# Altium PCB Ad Hoc Radio Node 2005 v4.PCBDOC
Units mm, origin at the board's own origin, x right, y up, seen from the top; angles counter-clockwise.
Board outline 127 x 101.6 mm, 4 copper layers (Top Layer, Internal Plane 1, Internal Plane 2, Bottom Layer); 63 components, 72 nets, 263 pads, 22 vias.
Unrouted connection lines stored in the file: 1.
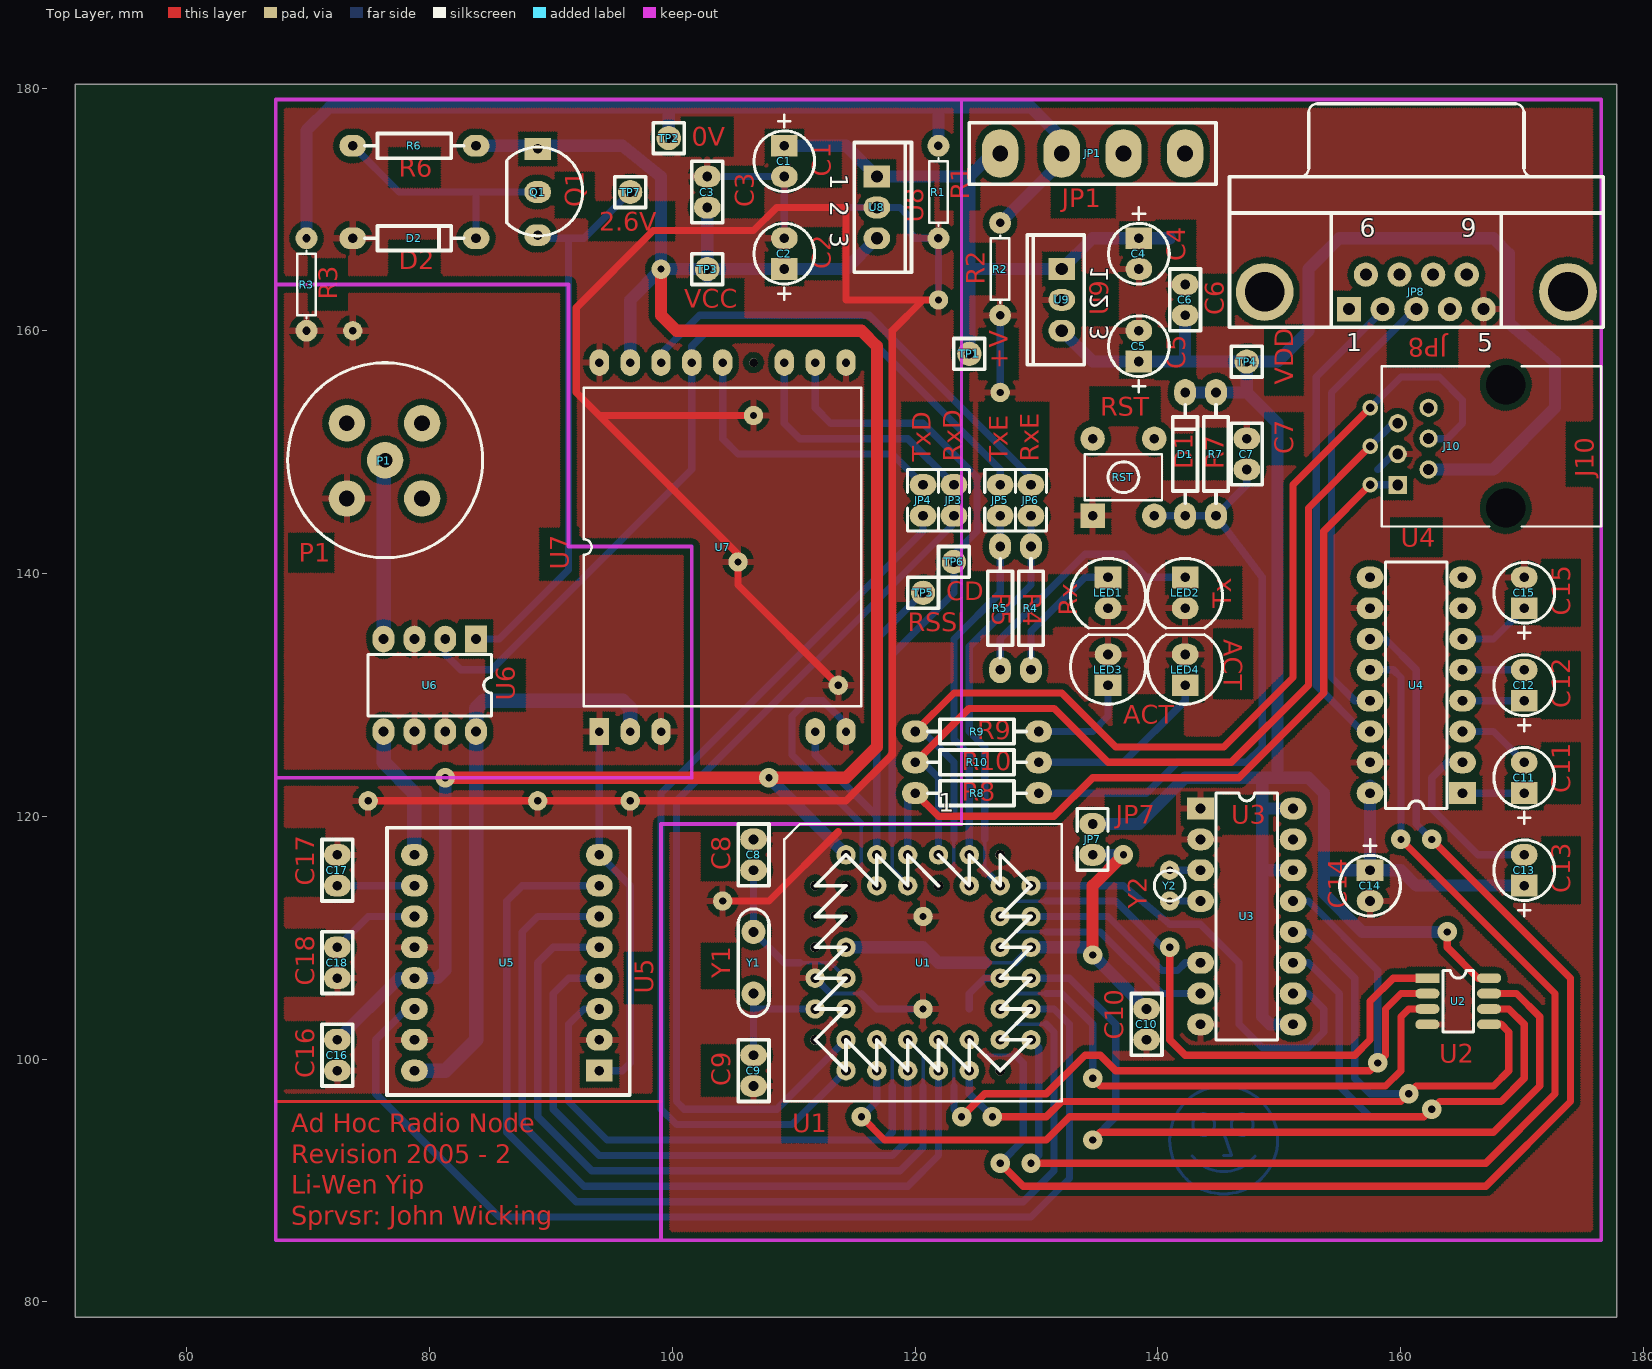
[diagram p0: Top Layer view]
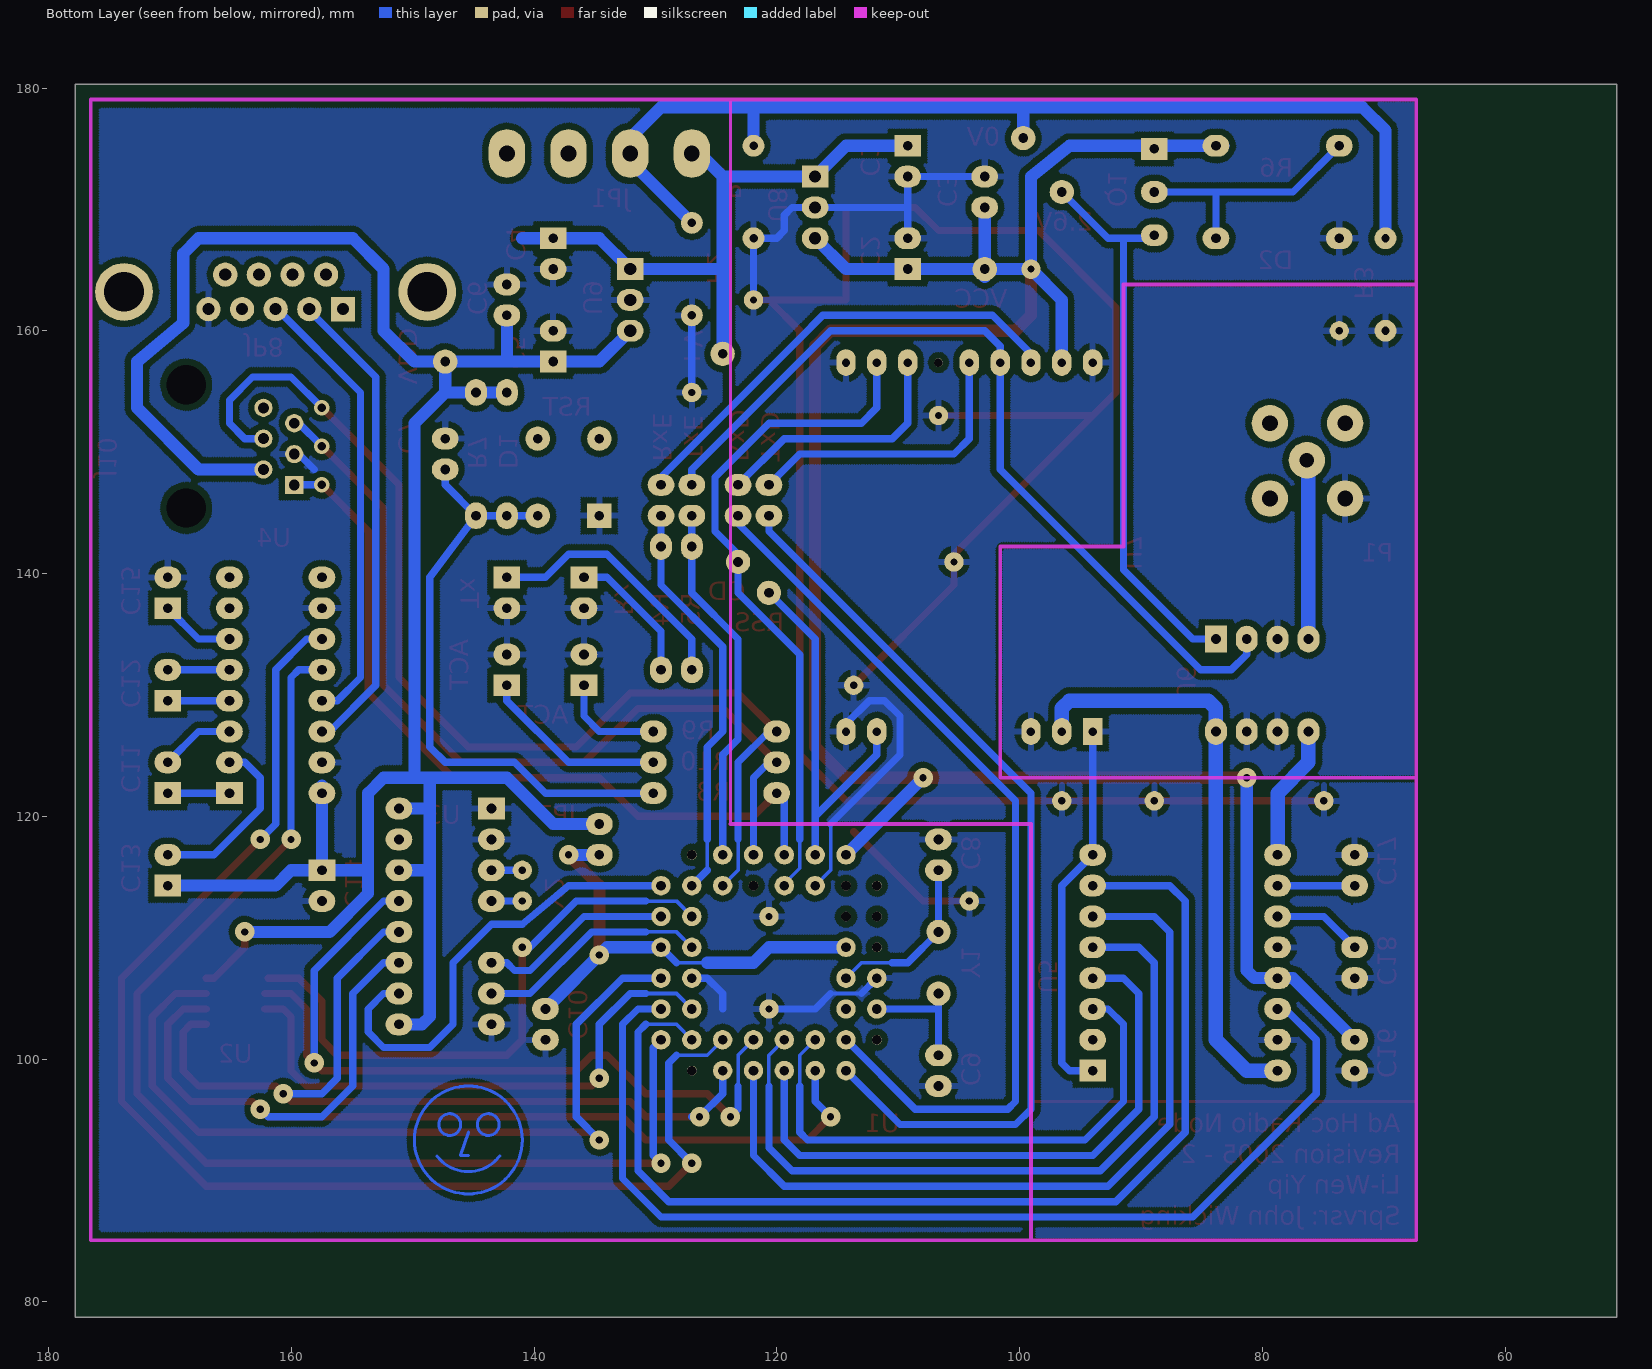
[diagram p1: Bottom Layer view, seen from below]
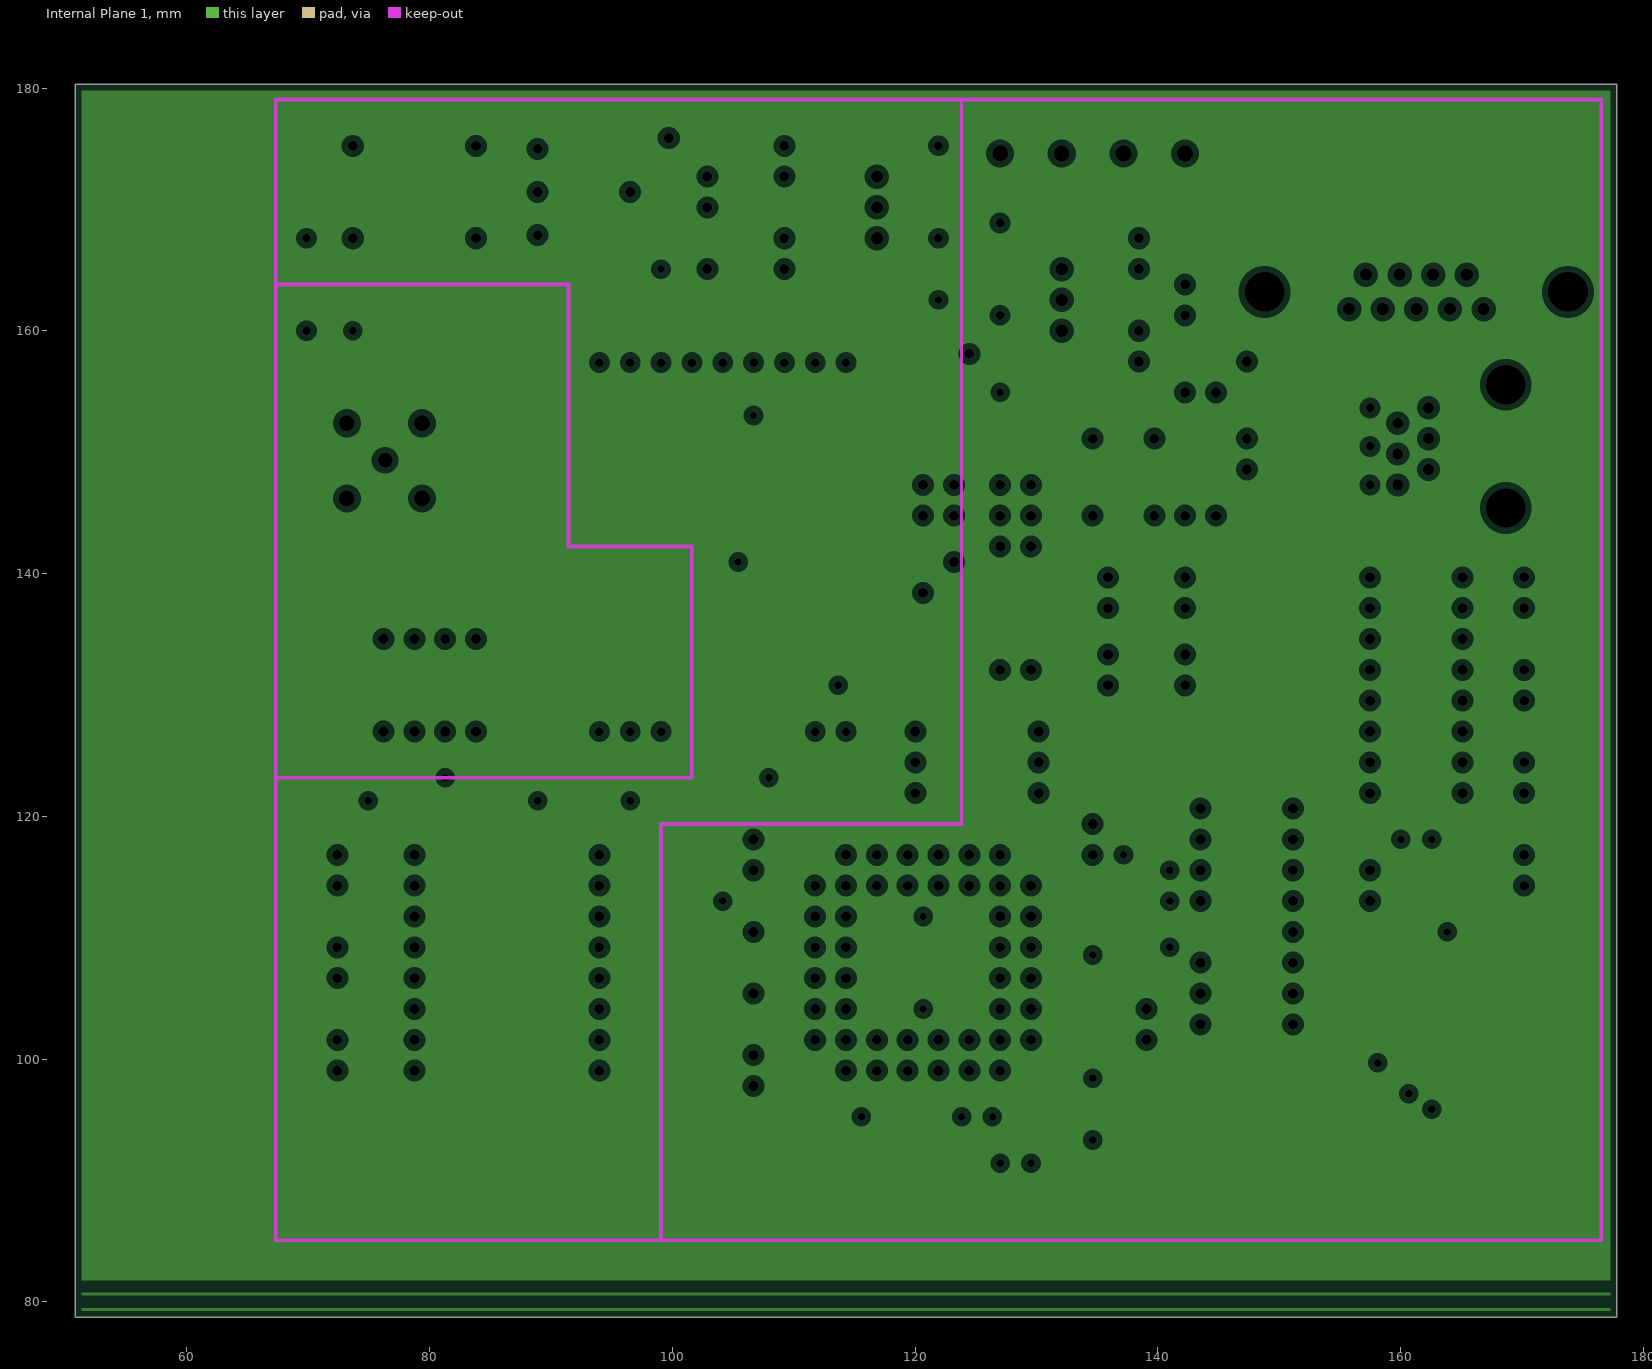
[diagram p2: Internal Plane 1, clearances drawn from the general rule]
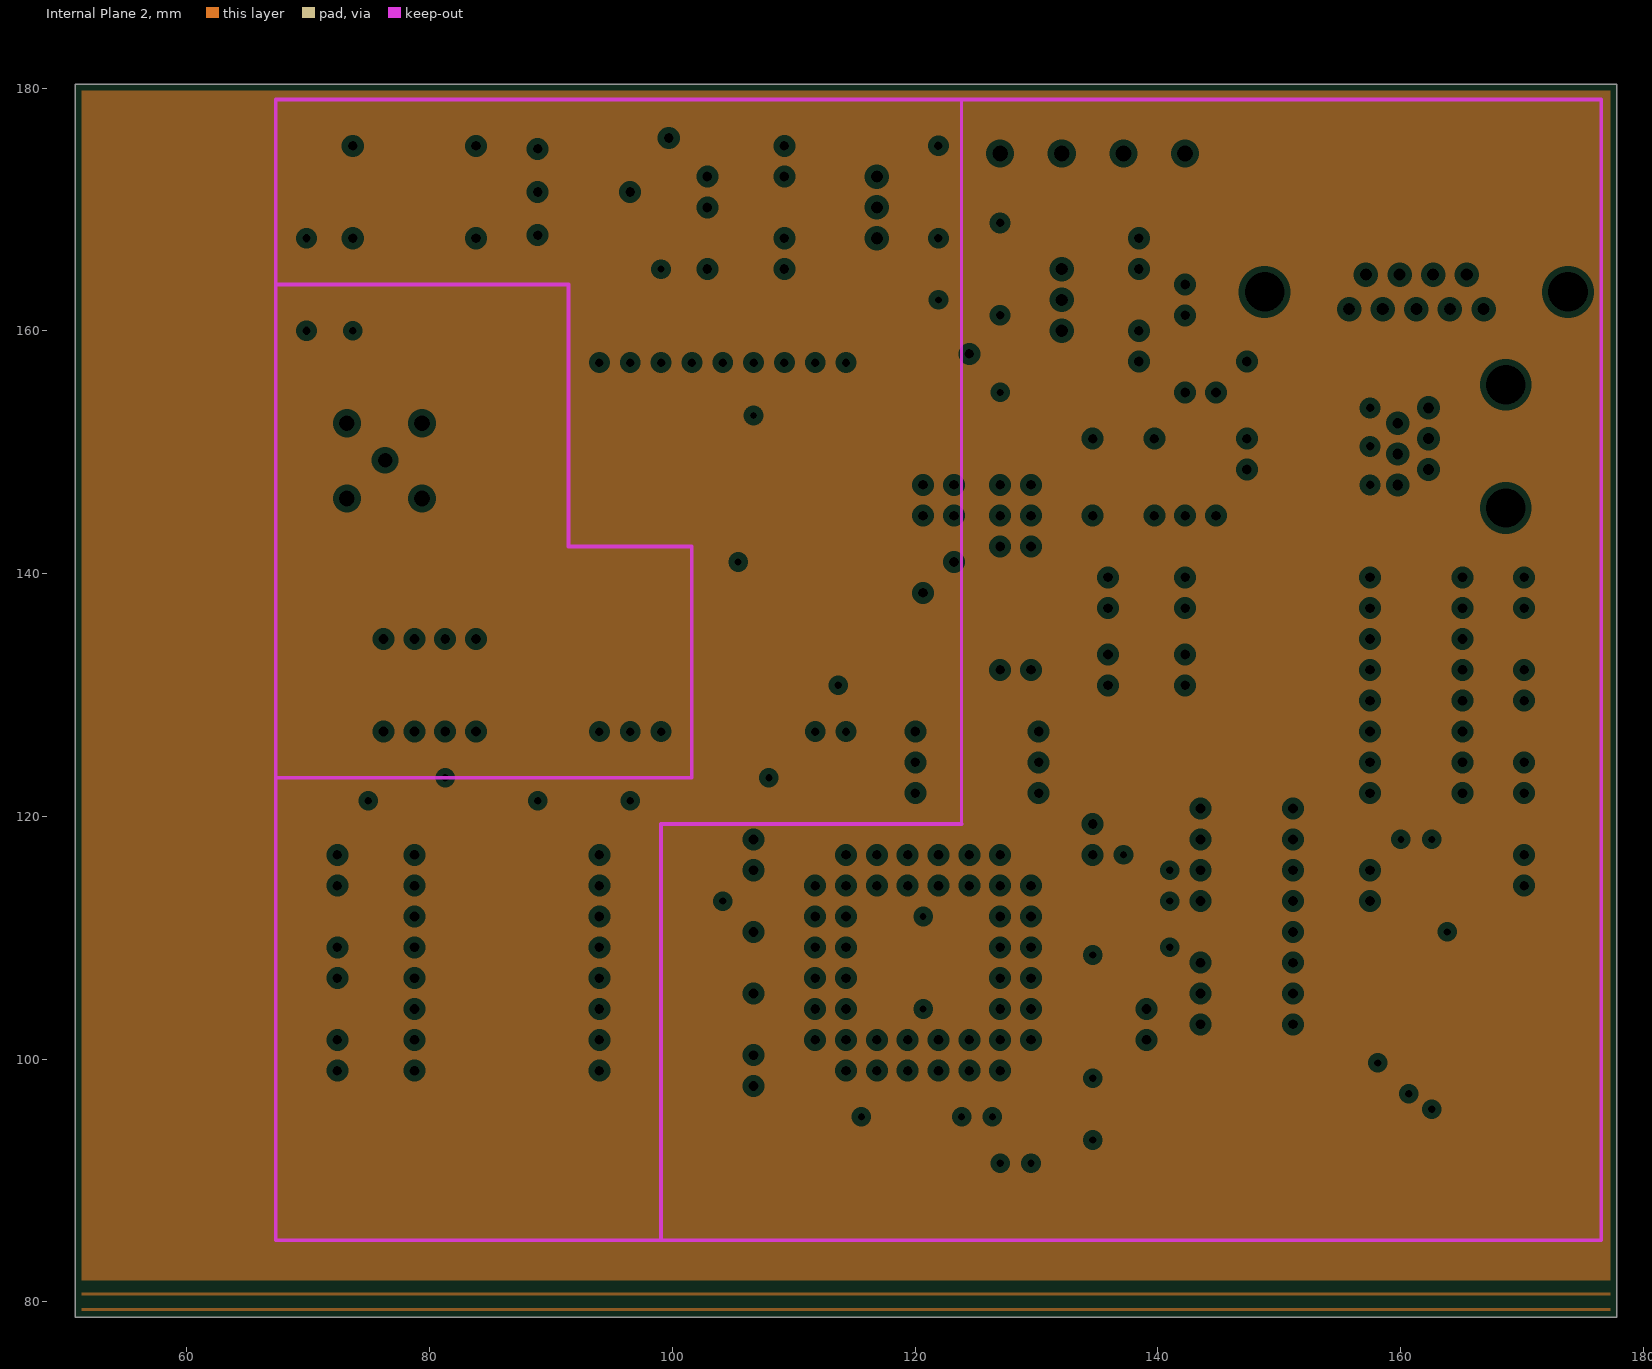
[diagram p3: Internal Plane 2, clearances drawn from the general rule]

## Layer stack, top to bottom
Top Layer: signal copper 0.0356
Dielectric: dielectric 0.32, FR-4, Dk 4.8
Internal Plane 1: plane copper 0.0356
Dielectric: dielectric 0.32, FR-4, Dk 4.8
Internal Plane 2: plane copper 0.0356
Dielectric: dielectric 0.32, FR-4, Dk 4.8
Bottom Layer: signal copper 0.0356

## Board outline
50.8,78.74 177.8,78.74 177.8,180.34 50.8,180.34

## Design rules (kind name [scope] priority, off if disabled: settings)
Clearance [All vs OnLayer('Keep-Out Layer')] p1: gap=0.5
Clearance Clearance_1 [All] p2: gap=0.5
ComponentClearance [All] p1: gap=0.254 collisioncheckmode=0
HoleSize [All] p1: absolutevalues=TRUE maxlimit=5 minlimit=0.6 maxpercent=80.000 minpercent=20.000
PlaneClearance [All] p1: clearance=0.508
PlaneConnect [All] p1: planeconnectstyle=Relief reliefexpansion=0.508 reliefentries=4 reliefconductorwidth=0.254 reliefairgap=0.254
PolygonConnect [All] p1: connectstyle=Relief reliefconductorwidth=0.5 reliefentries=4 polygonreliefangle="90 Angle"
RoomDefinition "Ad Hoc Radio Node 2005 v4" [InComponentClass('Ad Hoc Radio Node 2005 v4')] p1: confinementstyle=ConfineIn formatcopy=TRUE outline 0,0 50.8,0 50.8,25.4 0,25.4
RoutingLayers [All] p1: top layer=Horizontal bottom layer=Vertical
RoutingVias [All] p1: holewidth=0.6 width=1.6 viastyle="Through Hole" minholewidth=0.6 minwidth=1.6 maxholewidth=0.6 maxwidth=1.6
SolderMaskExpansion [All] p1: expansion=0.102
TestPointUsage [All] p1: valid=0 allowmultiple=FALSE
Testpoint [All] p1: side=15 testpointundercomponent=TRUE minsize=1.016 maxsize=2.54 preferedsize=1.524 minholesize=0 maxholesize=1.016 preferedholesize=0.813 testpointgrid=0.025 style=1023 order=-539222988
Width [All] p1: maxlimit=1.27 minlimit=0.3 preferedwidth=0.305 toplayer_prefwidth=0.6 bottomlayer_prefwidth=1 minimp=50.000000 maximp=50.000000 favimp=50.000000
13 further rules are at their usual default settings.

## Components (designator, comment, footprint, x,y, rotation, side; value= is the part's Value field where it differs from the comment)
C1 "Cap" "0.1 ELECTRO CAP" 109.22,175.26 r270 top
C2 "Cap" "0.1 ELECTRO CAP" 109.22,165.1 r90 top
C3 "Cap" "0.1 CERAMIC CAP" 105.41,172.72 r90 top
C4 "Cap" "0.1 ELECTRO CAP" 138.43,167.64 r270 top
C5 "Cap" "0.1 ELECTRO CAP" 138.43,157.48 r90 top
C6 "Cap" "0.1 CERAMIC CAP" 144.78,163.83 r90 top
C7 "0.1uF" "0.1 ceramic cap" 149.86,151.13 r90 top
C8 "Cap" "0.1 CERAMIC CAP" 104.14,115.57 r270 top
C9 "Cap" "0.1 CERAMIC CAP" 109.22,100.33 r90 top
C10 "" "0.1 CERAMIC CAP" 136.525,101.6 r270 top
C11 "Cap2" "0.1 ELECTRO CAP" 170.18,121.92 r90 top
C12 "Cap2" "0.1 ELECTRO CAP" 170.18,129.54 r90 top
C13 "Cap2" "0.1 ELECTRO CAP" 170.18,114.3 r90 top
C14 "Cap2" "0.1 ELECTRO CAP" 157.48,115.57 r270 top
C15 "Cap2" "0.1 ELECTRO CAP" 170.18,137.16 r90 top
C16 "" "0.1 CERAMIC CAP" 74.93,101.6 r90 top
C17 "" "0.1 CERAMIC CAP" 74.93,116.84 r90 top
C18 "" "0.1 CERAMIC CAP" 69.85,106.68 r270 top
D1 "1N914" DIODE-0.4/1.8 142.24,147.32 r90 top (schematic designator D2)
D2 "D Zener" DIODE-0.4/1.8 76.2,167.64 r0 top
J10 "43202-6101" JACK1.27-2H6 176.53,150.495 r90 top
JP1 "Header 4" "4 WAY TERMINAL BLOCK" 127,174.625 r0 top
JP3 "RxD" JUMPER 123.19,144.78 r90 top (schematic designator JP5)
JP4 "TxD" JUMPER 120.65,144.78 r90 top (schematic designator JP6)
JP5 "TxE" JUMPER 127,147.32 r270 top (schematic designator JP3)
JP6 "RxE" JUMPER 129.54,144.78 r90 top (schematic designator JP4)
JP7 "PWR" JUMPER 134.62,116.84 r90 top
JP8 "D Connector 9" DSUB1.385-2H9 161.29,172.72 r0 top (schematic designator JP7)
LED1 "Rx" "STD LED" 135.89,139.7 r270 top
LED2 "Tx" "STD LED" 142.24,139.7 r270 top
LED3 "ACT" "STD LED" 135.89,130.81 r90 top
LED4 "ACT" "STD LED" 142.24,130.81 r90 top
P1 "PCB BNC CONNECTOR" "PCB BNC CONNECTOR" 79.375,152.4 r270 top (schematic designator P2)
Q1 "BC548" BJT 88.9,173.99 r270 top
R1 "" AXIAL-0.3 121.92,171.45 r270 top
R2 "" AXIAL-0.3 127,165.1 r270 top
R3 "" AXIAL-0.3 69.85,163.83 r270 top
R4 "" AXIAL-0.4/1.8 129.54,139.7 r270 top
R5 "" AXIAL-0.4/1.8 127,139.7 r270 top
R6 "" AXIAL-0.4/1.8 81.28,175.26 r180 top
R7 "Res1" AXIAL-0.4/1.8 144.78,147.32 r90 top
R8 "Res1" AXIAL-0.4/1.8 122.555,121.92 r0 top
R9 "" AXIAL-0.4/1.8 122.555,127 r0 top
R10 "" AXIAL-0.4/1.8 122.555,124.46 r0 top
RST "SW-PB" "RESET SWITCH" 134.62,144.145 r90 top (schematic designator S1)
TP1 "+V" TESTPOINT 121.92,158.115 r0 top
TP2 "0V" TESTPOINT 97.155,175.895 r0 top
TP3 "VCC" TESTPOINT 102.87,167.64 r270 top
TP4 "VDD" TESTPOINT 147.32,160.02 r270 top
TP5 "RSSI" TESTPOINT 118.11,138.43 r0 top
TP6 "CD" TESTPOINT 120.65,140.97 r0 top
TP7 "2.6V" TESTPOINT 93.98,171.45 r0 top
U1 "PIC18C452_PLCC" "PLCC 44-WAY IC SOCKET" 111.76,116.84 r0 top
U2 "FRAM" SOP-8 162.205,106.68 r0 top
U3 "DS1306" DIP-16#1 143.51,120.65 r0 top
U4 "MAX232EPE" DIP-16#2 165.1,121.92 r180 top
U5 "" "ad8639 carrier board" 93.98,99.06 r180 top
U6 "ADG918" DIP-8 83.82,134.62 r270 top
U7 "X2010 NBFM Transceiver" X2010 93.98,127 r90 top
U8 "LM340T5.0" SFM-T3/A4.7V 116.84,170.18 r270 top
U9 "LM340T5.0" SFM-T3/A4.7V 132.08,162.56 r270 top
Y1 "XTAL" XTAL 106.68,110.49 r270 top
Y2 "XTAL" "watch crystal" 143.51,114.3 r270 top

## Footprints (in the part's own frame and the unit in brackets; to place one, negate y for a bottom-side part, rotate by r counter-clockwise, add the part's x,y. Pads: shape width x height; smd on the part's side, far side on the other; paste and mask are expansions set on the pad)
"0.1 CERAMIC CAP" [mm]
  oval 1.8x2.2 hole 0.8: 1(-2.54,2.54) 2(0,2.54)
  silkscreen extent -3.81,1.27 1.27,3.81
"0.1 ceramic cap" [mm]
  oval 1.8x2.2 hole 0.8: 1(-2.54,2.54) 2(0,2.54)
  silkscreen extent -3.81,1.27 1.27,3.81
"0.1 ELECTRO CAP" [mm] "Electrolytic Cap"
  rect 1.8x2.2 hole 0.8: 1(0,0)
  oval 1.8x2.2 hole 0.8: 2(2.54,0)
  silkscreen extent -2.54,-2.5 3.77,2.5
"4 WAY TERMINAL BLOCK" [mm]
  oval 3x4 hole 1.3: 1(0,0) 2(5.08,0) 3(10.16,0) 4(15.24,0)
  silkscreen extent -2.54,-2.54 17.78,2.54
"ad8639 carrier board" [mm]
  rect 2.2x1.8 hole 0.8: 1(0,0)
  oval 2.2x1.8 hole 0.8: 2(0,-2.54) 3(0,-5.08) 4(0,-7.62) 5(0,-10.16) 6(0,-12.7) 7(0,-15.24) 8(0,-17.78) 9(15.24,-17.78) 10(15.24,-15.24) 11(15.24,-12.7) 12(15.24,-10.16) 13(15.24,-7.62) 14(15.24,-5.08) 15(15.24,-2.54) 16(15.24,0)
  silkscreen extent -2.5,-20 17.5,2
AXIAL-0.3 [mm]
  round 1.8 hole 0.7: 1(-3.81,0) 2(3.81,0)
  silkscreen extent -2.77,-0.76 2.77,0.76
AXIAL-0.4/1.8 [mm]
  oval 2.2x1.8 hole 0.8: 1(-2.54,0) 2(7.62,0)
  silkscreen extent -1.52,-1.02 6.6,1.02
BJT [mm]
  rect 1.8x2.2 hole 0.8: 1(-1.016,0)
  oval 1.8x2.2 hole 0.8: 2(2.54,0) 3(6.096,0)
  silkscreen extent -1.16,-2.54 6.15,3.71
DIODE-0.4/1.8 [mm]
  oval 2.2x1.8 hole 0.8: 1(-2.54,0) 2(7.62,0)
  silkscreen extent -1.52,-1.02 6.6,1.02
DIP-8 [mm]
  rect 2.2x1.8 hole 0.8: 1(0,0)
  oval 2.2x1.8 hole 0.8: 2(0,-2.54) 3(0,-5.08) 4(0,-7.62) 5(7.62,-7.62) 6(7.62,-5.08) 7(7.62,-2.54) 8(7.62,0)
  silkscreen extent 1.27,-8.89 6.35,1.27
DIP-16#1 [mm]
  rect 2.2x1.8 hole 0.8: 1(0,0)
  oval 2.2x1.8 hole 0.8: 2(0,-2.54) 3(0,-5.08) 4(0,-7.62) 6(0,-12.7) 7(0,-15.24) 8(0,-17.78) 9(7.62,-17.78) 10(7.62,-15.24) 11(7.62,-12.7) 12(7.62,-10.16) 13(7.62,-7.62) 14(7.62,-5.08) 15(7.62,-2.54) 16(7.62,0)
  silkscreen extent 1.27,-19.05 6.35,1.27
DIP-16#2 [mm]
  rect 2.2x1.8 hole 0.8: 1(0,0)
  oval 2.2x1.8 hole 0.8: 2(0,-2.54) 3(0,-5.08) 4(0,-7.62) 5(0,-10.16) 6(0,-12.7) 7(0,-15.24) 8(0,-17.78) 9(7.62,-17.78) 10(7.62,-15.24) 11(7.62,-12.7) 12(7.62,-10.16) 13(7.62,-7.62) 14(7.62,-5.08) 15(7.62,-2.54) 16(7.62,0)
  silkscreen extent 1.27,-19.05 6.35,1.27
DSUB1.385-2H9 [mm]
  rect 2x2 hole 1: 1(-5.54,-10.92)
  round 2 hole 1: 2(-2.77,-10.92) 3(0,-10.92) 4(2.77,-10.92) 5(5.54,-10.92) 6(-4.155,-8.08) 7(-1.385,-8.08) 8(1.385,-8.08) 9(4.155,-8.08)
  round 4.76 hole 3.26: 10(-12.495,-9.5) 11(12.495,-9.5)
  silkscreen extent -15.4,-12.4 15.4,6
JACK1.27-2H6 [mm]
  rect 1.5x1.5 hole 0.9: 1(-3.175,16.77)
  round 1.5 hole 0.9: 2(-1.905,14.23) 3(-0.635,16.77) 4(0.635,14.23) 5(1.905,16.77) 6(3.175,14.23)
  round 2.95 hole 3.25: MH1(-5.08,7.88) MH2(5.08,7.88)
  silkscreen extent -6.6,0 6.6,18.1
JUMPER [mm]
  oval 1.8x2.2 hole 0.8: 1(0,0) 2(2.54,0)
  silkscreen extent -1.27,-1.27 3.81,1.27
"PCB BNC CONNECTOR" [mm]
  round 3 hole 1.2: 1(3.048,-3.048)
  round 3 hole 1.3: 2(0,0) 2(0,-6.2) 2(6.2,0) 2(6.2,-6.2)
  silkscreen extent -4.98,-11.08 11.08,4.98
"PLCC 44-WAY IC SOCKET" [mm]
  round 0.8 hole 0.8: 1(10.16,-2.54) 7(0,-2.54) 8(2.54,-2.54) 9(0,-5.08) 10(2.54,-5.08) 11(0,-7.62) 17(0,-15.24) 28(15.24,-17.78) 40(15.24,0)
  round 1.6 hole 0.8: 2(7.62,0) 3(7.62,-2.54) 4(5.08,0) 5(5.08,-2.54) 6(2.54,0) 12(2.54,-7.62) 13(0,-10.16) 14(2.54,-10.16) 15(0,-12.7) 16(2.54,-12.7) 18(2.54,-17.78) 19(2.54,-15.24) 20(5.08,-17.78) 21(5.08,-15.24) 22(7.62,-17.78) 23(7.62,-15.24) 24(10.16,-17.78) 25(10.16,-15.24) 26(12.7,-17.78) 27(12.7,-15.24) 29(17.78,-15.24) 30(15.24,-15.24) 31(17.78,-12.7) 32(15.24,-12.7) 33(17.78,-10.16) 34(15.24,-10.16) 35(17.78,-7.62) 36(15.24,-7.62) 37(17.78,-5.08) 38(15.24,-5.08) 39(17.78,-2.54) 41(15.24,-2.54) 42(12.7,0) 43(12.7,-2.54) 44(10.16,0)
  silkscreen extent -2.54,-20.32 20.32,2.54
"RESET SWITCH" [mm]
  rect 2x2 hole 0.8: 1(0.635,0)
  round 2 hole 0.8: 2(0.635,-5.08) ""(6.985,-5.08) ""(6.985,0)
  silkscreen extent 1.91,-5.71 5.71,0.64
SFM-T3/A4.7V [mm]
  rect 1.8x2.2 hole 1: 1(-2.54,0)
  oval 1.8x2.2 hole 1: 2(0,0) 3(2.54,0)
  silkscreen extent -5.35,-1.85 5.35,2.85
SOP-8 [mm]
  rect 2x0.8 smd: 1(0,0)
  oval 2x0.8 smd: 2(0,-1.27) 3(0,-2.54) 4(0,-3.81) 5(5.08,-3.81) 6(5.08,-2.54) 7(5.08,-1.27) 8(5.08,0)
  silkscreen extent 1.27,-4.44 3.81,0.64
"STD LED" [mm]
  rect 1.8x2.2 hole 0.8: 1(0,0)
  oval 1.8x2.2 hole 0.8: 2(2.54,0)
  silkscreen extent -1.56,-3.09 4.17,3.09
TESTPOINT [mm] "Test Point"
  round 2 hole 0.8: 1(2.54,0)
  silkscreen extent 1.27,-1.27 3.81,1.27
"watch crystal" [mm]
  round 1.6 hole 0.6: 1(-1.27,-2.54) 2(1.27,-2.54)
  silkscreen extent -1.27,-3.81 1.27,-1.27
X2010 [mm]
  rect 2.2x1.6 hole 0.7: 1(0,0)
  oval 2.2x1.6 hole 0.7: 2(0,-2.54) 3(0,-5.08) 8(0,-17.78) 9(0,-20.32) 10(30.4,-20.32) 11(30.4,-17.78) 12(30.4,-15.24) 14(30.4,-10.16) 15(30.4,-7.62) 16(30.4,-5.08) 17(30.4,-2.54) 18(30.4,0)
  round 0.7 hole 0.7: 13(30.4,-12.7)
  silkscreen extent 2.08,-21.59 28.32,1.27
XTAL [mm] "Crystal"
  round 2 hole 0.8: 1(0,0) 2(5.08,0)
  silkscreen extent -1.9,-1.27 6.98,1.27

## Part data
C1 C2 C3 C4 C5 C6 C8 C9 C11 C12 C13 C15: "Capacitor"
C7: library part CAP, "Capacitor"
C10 C16 C17 C18: library part Cap, "Capacitor"
C14: library part "Cap Pol1", "Polarized Capacitor (Radial)"
D1: library part Diode, "Default Diode"
D2: "Zener Diode"
J10: library part 15-43-6566, "Right Angle, Standard Profile, Flange Mount PCB Jack"
JP1: "Header, 4-Pin"
JP3 JP4 JP5 JP6 JP7: library part JUMPER
JP8: "Receptacle Assembly, 9 Position, Right Angle"
LED1 LED2 LED3 LED4: library part LED2, "Typical RED, GREEN, YELLOW, AMBER GaAs LED"
P1: library part BNC, "BNC Elbow Connector"
Q1: library part NPN, "NPN Bipolar Transistor"
R1 R2 R3 R4 R5 R6 R9 R10: library part Res1, "Resistor"
R7 R8: "Resistor"
RST: "Switch"
TP1 TP2 TP3 TP4 TP5 TP6 TP7: library part TESTPOINT, "Test Point"
U4: "+5V Powered RS-232 Driver/Receiver"
U5: library part AD8369_DIGITAL_CONT_PWR_AMP
U6: library part "T7 NBFM TRANSMITTER"
U7: library part "R7 NBFM RECEIVER"
U8 U9: "Series 3-Terminal Positive Regulator"
Y1 Y2: "Crystal Oscillator"

## Free pads (board coordinates)
  round 1.6 hole 0.6: 0(121.92,162.56) 1(127,154.94) 2(74.93,121.285) 2(120.65,104.14) 3(73.66,160.02) 3(120.65,111.76) 4(105.41,140.97) 6(104.14,113.03) 7(106.68,153.035) 8(113.665,130.81) 9(88.9,121.285) 10(96.52,121.285)

## Via types
v1: diameter 1.6, hole 0.6, Top Layer to Bottom Layer, 19 vias
v2: diameter 1.27, hole 0.711, Top Layer to Bottom Layer, 3 vias

## Nets (pads, with @x,y where several pads share a name; then routed paths per layer and width w, separated by ;. In a path a pad name is that pad's centre, name@x,y a point inside that pad or via, vN(x,y) a via of type N, cw(c..) or ccw(c..) an arc to the next point about the centre after c; other vN are vias at no path point)
0V: JP1.2 R1.1 R2.1 R3.1 TP2.1 | length 87.8
  Bottom Layer w1: R3.1 69.85,176.53 71.755,178.435 129.54,178.435 132.08,175.895 132.08,173.99 R2.1 ; TP2.1 99.695,178.435 ; R1.1 121.92,178.435
2.6V: Q1.3 TP7.1 U6.1 | length 46.5
  Bottom Layer w0.6: U6.1 85.725,134.62 91.44,140.335 91.44,167.64 ; Q1.3@88.9,167.64 91.44,167.64 ; TP7.1 92.71,167.64 91.44,167.64
3.3V: D2.2 Q1.2 R6.2 | length 20.6
  Bottom Layer w0.6: R6.2 77.47,171.45 Q1.2 ; D2.2 83.82,171.45
ANTENNA: P1.1 U6.4 | length 14.6
  Bottom Layer w1.2: U6.4 P1.1@76.2,149.225
B0: U1.21 U5.3 | length 45.8
  Bottom Layer w0.3: U1.21 118.11,100.33 118.11,97.79
  Bottom Layer w0.6: U5.3 92.71,104.14 91.44,102.87 91.44,96.52 94.615,93.345 117.475,93.345 118.11,93.98 118.11,97.79
B1: U1.22 U5.4 | length 50.9
  Bottom Layer w0.6: U5.4 91.44,106.68 90.17,105.41 90.17,95.885 93.98,92.075 118.11,92.075 119.38,93.345 U1.22
B2: U1.23 U5.5 | length 62.1
  Bottom Layer w0.3: U1.23 120.65,100.33 120.65,97.79
  Bottom Layer w0.6: U5.5 90.17,109.22 88.9,107.95 88.9,95.25 93.345,90.805 118.745,90.805 120.65,92.71 120.65,97.79
B3: U1.24 U5.6 | length 67.2
  Bottom Layer w0.6: U5.6 88.9,111.76 87.63,110.49 87.63,94.615 92.71,89.535 119.38,89.535 121.92,92.075 U1.24
C1+: C11.1 U4.1 | length 5.1
  Bottom Layer w0.6: U4.1 C11.1
C1-: C11.2 U4.3 | length 6.1
  Bottom Layer w0.6: U4.3 167.64,127 C11.2
C2+: C12.1 U4.4 | length 5.1
  Bottom Layer w0.6: U4.4 C12.1
C2-: C12.2 U4.5 | length 5.1
  Bottom Layer w0.6: U4.5 C12.2
CD: TP6.1 U1.3 U7.11 | length 56.3
  Bottom Layer w0.3: 118.11,118.11 118.11,115.735 U1.3@119.38,114.465
  Bottom Layer w0.6: U7.11 111.76,153.67 113.03,152.4 120.65,152.4 125.095,147.955 125.095,143.51 123.19,141.605 123.19,138.43 118.11,133.35 118.11,118.11
CPUPWR: C10.1 JP7.1 U1.12 U1.35 | length 39.8
  Top Layer w1: v1(134.62,108.585) 134.62,114.3 v1(137.16,116.84)
  Bottom Layer w0.3: 125.73,107.95 128.27,107.95
  Bottom Layer w0.6: 128.27,107.95 U1.35
  Bottom Layer w1: U1.12 120.65,109.22 121.92,107.95 125.73,107.95 ; U1.35 133.985,109.22 C10.1 ; JP7.1 v1(137.16,116.84)
DENB: U1.30 U5.7 | length 93
  Bottom Layer w0.3: U1.30 128.27,102.87 130.81,102.87
  Bottom Layer w0.6: U5.7@94.615,114.3 87.63,114.3 86.36,113.03 86.36,93.98 92.075,88.265 128.905,88.265 131.445,90.805 131.445,102.235 130.81,102.87
FRAM_CS: U1.38 U2.1 | length 49.7
  Top Layer w0.6: v1(140.97,109.22) 140.97,101.6 142.24,100.33 156.21,100.33 157.48,101.6 157.48,104.775 159.385,106.68 U2.1@161.925,106.68
  Bottom Layer w0.3: U1.38 128.27,113.03 130.81,113.03
  Bottom Layer w0.6: 130.81,113.03 132.715,113.03 136.525,113.03 140.335,109.22 v1(140.97,109.22)
GND: C4.2 C5.2 C6.2 C7.2 C8.1 C9.1 C10.2 C14.2 C15.2 J10.3 JP8.5 LED1.2 LED2.2 LED3.2 LED4.2 pad.1 pad.2@120.65,104.14 pad.3@120.65,111.76 pad.6 R2.2 RST.1 U1.13 U1.34 U2.4 U3.1 U3.2 U3.8 U4.10 U4.15 U9.2 | length 34.7
  Top Layer w0.6: pad.6 107.95,113.03 113.665,118.745
  Bottom Layer w0.3: 113.03,105.41 115.57,105.41
  Bottom Layer w0.6: U1.13 113.03,105.41 ; 115.57,105.41 116.84,104.14 pad.2@120.65,104.14 ; 124.46,104.14 124.46,105.41 125.73,106.68 U1.34 ; pad.1 R2.2 ; 158.115,148.59 159.385,149.86 J10.3
HOLD: U1.33 U2.7 | length 68.5
  Top Layer w0.6: v1(134.62,93.345) 135.255,93.98 167.64,93.98 171.45,97.79 171.45,103.505 169.545,105.41 U2.7@167.005,105.41
  Bottom Layer w0.6: U1.33 132.715,106.68 136.525,102.87 136.525,95.25 v1(134.62,93.345)
INT1: U1.37 U3.6 | length 16.1
  Bottom Layer w0.6: U1.37 135.89,111.76 140.335,107.315 141.605,107.315 142.24,107.95 U3.6
INTO: U1.36 U3.7 | length 19.1
  Bottom Layer w0.3: U1.36 128.27,110.49 130.81,110.49
  Bottom Layer w0.6: 130.81,110.49 135.255,110.49 140.335,105.41 U3.7
MCLR: J10.1 R8.1 U1.2 | length 64.6
  Top Layer w0.6: R8.1 121.92,120.015 131.445,120.015 134.62,123.19 146.685,123.19 153.67,130.175 153.67,143.51 v2(157.48,147.32)
  Bottom Layer w0.6: U1.2@119.38,117.475 119.38,121.285 R8.1 ; v2(157.48,147.32) J10.1@160.02,147.32
MISO: U1.25 U2.2 U3.13 | length 70
  Top Layer w0.6: v1(123.825,95.25) 125.73,97.155 130.81,97.155 133.985,100.33 135.255,100.33 136.525,99.06 157.48,99.06 158.75,100.33 158.75,104.14 160.02,105.41 U2.2
  Bottom Layer w0.3: U1.25 123.19,100.33 123.19,97.79
  Bottom Layer w0.6: 123.19,97.79 123.19,95.885 v1(123.825,95.25) ; U3.13 152.4,113.03 158.115,107.315 v1(158.115,99.695)
MOSI: U1.26 U2.5 U3.12 | length 74.6
  Top Layer w0.6: v1(126.365,95.25) 130.81,95.25 132.08,96.52 160.02,96.52 161.29,97.79 167.64,97.79 168.91,99.06 168.91,102.235 168.275,102.87 U2.5@167.005,102.87
  Bottom Layer w0.6: U1.26 124.46,97.155 v1(126.365,95.25) v1@127,95.25 ; U3.12 152.4,110.49 156.21,106.68 156.21,98.425 157.48,97.155 v1(160.655,97.155)
NetC13_2: C13.2 U4.2 | length 14.8
  Bottom Layer w0.6: U4.2 163.83,124.46 162.56,123.19 162.56,120.65 166.37,116.84 C13.2
NetC15_1: C15.1 U4.6 | length 6.1
  Bottom Layer w0.6: U4.6 167.64,134.62 C15.1
NetC17_1: C17.1 U5.10 | length 6.3
  Bottom Layer w0.6: C17.1 U5.10
NetC18_1: C18.1 U5.11 | length 7.4
  Bottom Layer w0.6: C18.1 74.93,111.76 U5.11
NetLED1_1: LED1.1 R4.2 | length 11.4
  Bottom Layer w0.6: R4.2 129.54,135.255 133.985,139.7 LED1.1
NetLED2_1: LED2.1 R5.2 | length 21.5
  Bottom Layer w0.6: R5.2 127,134.62 133.985,141.605 137.16,141.605 139.065,139.7 LED2.1
NetLED3_1: LED3.1 R9.2 | length 8.8
  Bottom Layer w0.6: R9.2 134.62,127 135.89,128.27 LED3.1
NetLED4_1: LED4.1 R10.2 | length 15.4
  Bottom Layer w0.6: R10.2 137.16,124.46 142.24,129.54 LED4.1
NetU1_16: U1.16
NetU3_3: U3.3 Y2.1 | length 2.5
  Bottom Layer w0.6: Y2.1 U3.3
NetU3_4: U3.4 Y2.2 | length 2.5
  Bottom Layer w0.6: Y2.2 U3.4
OSC1: C8.2 U1.14 Y1.1 | length 14.3
  Bottom Layer w0.3: 110.49,107.95 113.03,107.95 U1.14
  Bottom Layer w0.6: C8.2 Y1.1 109.22,107.95 110.49,107.95
OSC2: C9.2 U1.15 Y1.2 | length 10.2
  Bottom Layer w0.6: C9.2 Y1.2 ; 106.68,104.14 U1.15
PWUP: U1.31 U5.14 | length 87.7
  Bottom Layer w0.6: U5.14 78.105,104.14 75.565,101.6 75.565,97.155 85.725,86.995 129.54,86.995 132.715,90.17 132.715,102.87 131.445,104.14 U1.31
R1IN: JP8.3 U4.13 | length 37.3
  Bottom Layer w0.6: U4.13 156.21,129.54 154.305,131.445 154.305,154.94 JP8.3@161.29,161.925
R1OUT: U1.29 U4.12 | length 98.6
  Top Layer w0.6: v1(129.54,91.44) 167.005,91.44 172.72,97.155 172.72,105.41 v1(160.02,118.11)
  Bottom Layer w0.6: v1(129.54,91.44) 130.175,92.075 130.175,100.965 U1.29 ; U4.12 159.385,132.08 160.02,131.445 v1(160.02,118.11)
RFGND: P1.2@73.175,146.2 pad.3@73.66,160.02 R3.2 U5.1 U5.8 U6.3 U6.6 U6.7 U7.1 U7.3 | length 31.2
  Bottom Layer w0.6: U5.1 95.885,99.06 96.52,99.695 96.52,114.3 U5.8 U7.1
RSSI: TP5.1 U1.4 U7.8 | length 32.3
  Bottom Layer w0.6: U7.8 111.76,125.095 116.84,120.015 ; U1.4 116.84,120.015 ; TP5.1 116.84,134.62 116.84,120.015
RST: C7.1 D1.1 R7.1 R8.2 RST.2 | length 50.8
  Bottom Layer w0.6: R8.2 139.065,121.92 141.605,124.46 147.32,124.46 148.59,125.73 148.59,139.7 ; RST.2@139.7,145.415 RST.2 D1.1 R7.1 ; C7.1 147.32,147.32 R7.1 ; 148.56,139.73 R7.1
RTC_CS: U1.39 U3.10 | length 38
  Bottom Layer w0.6: U1.39 137.16,114.3 140.97,111.125 143.51,111.125 146.685,107.95 146.685,102.87 148.59,100.965 152.4,100.965 153.67,102.235 153.67,104.14 152.4,105.41 U3.10
RXACT: J10.4 R9.1 U1.43 | length 91.4
  Top Layer w0.6: R9.1 123.19,130.175 132.08,130.175 136.525,125.73 145.415,125.73 151.13,131.445 151.13,147.32 v2(157.48,153.67)
  Bottom Layer w0.3: 123.19,118.045 123.19,115.57 U1.43
  Bottom Layer w0.6: R9.1 120.65,127 123.19,124.46 123.19,118.11 ; v2(157.48,153.67) 160.02,156.21 163.195,156.21 165.1,154.305 165.1,152.4 163.83,151.13 J10.4@161.925,151.13
RXD: JP3.2 U7.12 | length 21.1
  Bottom Layer w0.6: U7.12 109.22,152.4 110.49,151.13 119.38,151.13 JP3.2
RXD_2: JP3.1 U1.19 | length 74.3
  Bottom Layer w0.6: U1.19 108.585,95.885 100.965,95.885 100.33,96.52 100.33,121.285 123.19,144.145 JP3.1
RXEN: JP6.2 U7.16 | length 38.6
  Bottom Layer w0.6: U7.16@99.06,157.48 99.06,158.115 102.235,161.29 116.205,161.29 118.11,159.385 129.54,147.955 JP6.2
RXEN_2: JP6.1 R4.1 U1.41 | length 33.6
  Bottom Layer w0.3: 125.73,115.57 125.73,118.11
  Bottom Layer w0.6: 125.73,115.57 U1.41 ; 125.73,118.11 125.73,125.73 124.46,127 124.46,133.985 129.54,139.065 JP6.1
SCLK: U1.20 U2.6 U3.11 | length 91.4
  Top Layer w0.6: v1(115.57,95.25) 117.475,93.345 130.81,93.345 132.715,95.25 161.925,95.25 v1(162.56,95.885) 163.195,96.52 168.275,96.52 170.18,98.425 170.18,102.87 168.91,104.14 U2.6@167.005,104.14
  Bottom Layer w0.6: v1(115.57,95.25) 116.84,96.52 U1.20 ; U3.11 152.4,107.95 154.94,105.41 154.94,97.79 157.48,95.25 161.925,95.25 v1(162.56,95.885)
SGND: C1.2 C2.2 C3.2 C16.1 C17.2 C18.2 D2.1 pad.0 pad.2@74.93,121.285 pad.4 pad.7 pad.8 pad.9 pad.10 R1.2 U1.5 U5.2 U5.12 U5.15 U7.9 U7.10 U7.18 U8.2 | length 230.5
  Top Layer w0.6: pad.2@74.93,121.285 114.3,121.285 118.11,125.095 118.11,160.02 120.65,162.56 ; 93.98,153.035 pad.7 ; pad.8 105.41,139.065 105.41,141.605 92.075,154.94 92.075,161.925 98.425,168.275 106.68,168.275 108.585,170.18 114.3,170.18 114.3,162.56 pad.0
  Bottom Layer w0.3: 115.57,119.38 115.57,115.57 U1.5
  Bottom Layer w0.6: C3.2 106.045,172.72 C1.2 109.22,170.18 ; C2.2@109.22,168.275 109.22,170.18 ; U7.9 114.3,127.635 112.395,129.54 111.125,129.54 109.855,128.27 109.855,125.095 115.57,119.38 ; pad.0 R1.2 120.015,167.64 119.38,168.275 119.38,169.545 118.745,170.18 U8.2 109.22,170.18
SUPPLY: C1.1 C4.1 JP1.1 TP1.1 U8.1 U9.1 | length 51.8
  Bottom Layer w1: C1.1 114.3,175.26 U8.1 124.46,172.72 ; TP1.1 124.46,165.1 ; JP1.1 126.365,174.625 124.46,172.72 ; 140.97,167.64 134.62,167.64 U9.1 127,165.1 124.46,165.1 ; 124.46,165.1 124.46,172.72
T1IN: U1.27 U4.11 | length 110.6
  Top Layer w0.6: v1(127,91.44) 128.905,89.535 167.005,89.535 173.99,96.52 173.99,106.68 v1(162.56,118.11)
  Bottom Layer w0.3: U1.27 125.73,100.33 128.27,100.33
  Bottom Layer w0.6: v1(127,91.44) 128.905,93.345 128.905,99.695 128.27,100.33 ; U4.11 158.75,134.62 161.29,132.08 161.29,119.38 v1(162.56,118.11)
T1OUT: JP8.2 U4.14 | length 39.5
  Bottom Layer w0.6: U4.14 156.845,127 153.035,130.81 153.035,156.21 JP8.2@158.75,161.925
TXACT: J10.5 R10.1 U1.44 | length 72
  Top Layer w0.6: R10.1 124.46,128.905 131.445,128.905 135.89,124.46 146.05,124.46 152.4,130.81 152.4,145.415 v2(157.48,150.495)
  Bottom Layer w0.6: R10.1 120.65,124.46 121.92,123.19 U1.44 ; v2(157.48,150.495) J10.5@159.385,152.4
TXD: JP4.2 U7.14 | length 24.4
  Bottom Layer w0.6: U7.14 104.14,151.13 105.41,149.86 118.11,149.86 JP4.2
TXD_2: JP4.1 U1.18 | length 75.4
  Bottom Layer w0.6: U1.18 109.855,94.615 100.33,94.615 99.06,95.885 99.06,121.92 120.65,143.51 JP4.1
TXEN: JP5.1 JP5.2 R5.1 U1.42 U6.2 U7.15 | length 101.6
  Bottom Layer w0.6: U6.2 81.28,133.35 82.55,132.08 85.09,132.08 101.6,148.59 U7.15 ; U7.15@101.6,157.48 101.6,158.75 102.87,160.02 115.57,160.02 127,148.59 JP5.1 ; U1.42@124.46,117.475 U1.42 124.46,125.095 123.19,126.365 123.19,134.62 127,138.43 JP5.2
TXRFOUT: 
TXRFOUT: 
TXRFOUT: 
TXRFOUT: 
TXRFOUT: 
TXRFOUT: 
TXRFOUT: 
TXRFOUT: 
TXRFOUT: 
TXRFOUT: U5.16 U6.8 U7.2 | length 48.6
  Bottom Layer w1.2: U5.16 81.28,99.06 83.82,101.6 83.82,121.92 83.82,123.19 83.82,128.905 84.455,129.54 95.885,129.54 96.52,128.905 U7.2
VCC: C2.1 C3.1 C16.2 Q1.1 R6.1 TP3.1 U1.6 U5.13 U7.17 U8.3 | length 186
  Top Layer w1: v1(81.28,123.19) 114.3,123.19 116.84,125.73 116.84,158.75 115.57,160.02 100.33,160.02 99.06,161.29 v1(99.06,165.1)
  Bottom Layer w1: C16.2 77.47,106.68 80.645,106.68 81.28,107.315 v1(81.28,123.19) ; R6.1@83.185,175.26 95.885,175.26 99.06,172.72 v1(99.06,165.1) ; U7.17@96.52,157.48 96.52,162.56 v1(99.06,165.1) ; TP3.1@102.87,164.465 C3.1 ; v1(107.95,123.19) U1.6 ; U8.3 114.3,165.1 108.585,165.1 v1(99.06,165.1)
VDD: C5.1 C6.1 C13.1 C14.1 D1.2 J10.2 JP7.2 R7.2 TP4.1 U2.8 U3.9 U3.14 U3.16 U4.16 U9.3 | length 214.5
  Top Layer w0.6: v1(163.83,110.49) 163.83,109.22 166.37,106.68 U2.8@167.005,106.68
  Bottom Layer w1: U9.3 134.62,157.48 149.86,157.48 152.4,160.02 152.4,165.1 154.94,167.64 167.64,167.64 168.91,166.37 168.91,160.655 172.72,157.48 172.72,153.67 167.64,148.59 J10.2@162.56,148.59 ; JP7.2 138.43,119.38 142.24,123.19 152.4,123.19 153.67,121.92 153.67,113.665 156.845,110.49 v1(163.83,110.49) ; D1.2 147.32,154.94 ; 142.24,157.48 C6.1 ; TP4.1 147.32,154.94 ; 148.59,115.57 U3.14 ; 148.59,120.65 U3.16 ; 148.59,123.19 148.59,103.505 149.225,102.87 U3.9 ; 149.86,123.19 149.86,152.4 147.32,154.94 ; 153.67,115.57 C14.1 ; U4.16@157.48,122.555 C14.1 ; C13.1 161.29,114.3 160.02,115.57 C14.1
VGA_OUT: U5.9 U6.5 | length 11.2
  Bottom Layer w1.2: U6.5 76.2,124.46 78.74,121.92 U5.9
VREFH: 
WP: U1.32 U2.3 | length 46.7
  Top Layer w0.6: v1(134.62,98.425) 135.255,97.79 158.75,97.79 160.02,99.06 160.02,103.505 160.655,104.14 U2.3
  Bottom Layer w0.3: U1.32 128.27,105.41 130.81,105.41
  Bottom Layer w0.6: 130.81,105.41 132.08,105.41 134.62,102.87 v1(134.62,98.425)
pads on no net: J10.6 J10.MH1 J10.MH2 JP1.3 JP1.4 JP8.1 JP8.4 JP8.6 JP8.7 JP8.8 JP8.9 JP8.10 JP8.11 P1.2@73.175,152.4 P1.2@79.375,146.2 P1.2@79.375,152.4 RST. U1.1 U1.7 U1.8 U1.9 U1.10 U1.11 U1.17 U1.28 U1.40 U3.15 U4.7 U4.8 U4.9 U7.13
copper on no net: | length 79.6
  Top Layer w0.254: 67.31,96.52 99.06,96.52
  Bottom Layer w0.254: 142.825,92.037 ccw(c145.415,93.98) 148.005,92.037 ; 145.415,92.075 146.05,92.075 145.415,93.98 ; 144.671,94.615 ccw(c143.773,94.615) 144.671,94.615 ; 147.846,94.615 ccw(c146.948,94.615) 147.846,94.615 ; 149.86,93.345 ccw(c145.415,93.345) 149.86,93.345

## Polygon pours and split planes (outlines as drawn)
GND on Top Layer (hatched 90Degree grid 0.2 track 0.25, remove dead copper): 99.06,85.09 99.06,119.38 123.825,119.38 123.825,179.07 176.53,179.07 176.53,85.09
RFGND on Top Layer (hatched 90Degree grid 0.2 track 0.25, remove dead copper): 67.31,163.83 91.44,163.83 91.44,142.24 101.6,142.24 101.6,123.19 67.31,123.19
SGND on Top Layer (hatched 90Degree grid 0.2 track 0.25, remove dead copper): 67.31,179.07 67.31,163.83 91.44,163.83 91.44,142.24 101.6,142.24 101.6,123.19 67.31,123.19 67.31,85.09 99.06,85.09 99.06,119.38 123.825,119.38 123.825,179.07
GND on Bottom Layer (hatched 90Degree grid 0.2 track 0.25, remove dead copper): 99.06,85.09 99.06,119.38 123.825,119.38 123.825,179.07 176.53,179.07 176.53,85.09
RFGND on Bottom Layer (hatched 90Degree grid 0.2 track 0.25, remove dead copper): 67.31,163.83 91.44,163.83 91.44,142.24 101.6,142.24 101.6,123.19 67.31,123.19
SGND on Bottom Layer (hatched 90Degree grid 0.2 track 0.25, remove dead copper): 67.31,179.07 67.31,163.83 91.44,163.83 91.44,142.24 101.6,142.24 101.6,123.19 67.31,123.19 67.31,85.09 99.06,85.09 99.06,119.38 123.825,119.38 123.825,179.07
no net on Internal Plane 1 (split plane): 1923.923,208.974 1923.923,209.227 2049.907,209.227 2049.907,208.974
no net on Internal Plane 1 (split plane): 1923.923,207.704 1923.923,207.957 2049.907,207.957 2049.907,207.704
no net on Internal Plane 1 (split plane): 1923.923,108.644 1923.923,206.687 2049.907,206.687 2049.907,108.644
no net on Internal Plane 1 (split plane): 1923.923,107.374 1923.923,107.627 2049.907,107.627 2049.907,107.374
no net on Internal Plane 1 (split plane): 1923.923,106.104 1923.923,106.357 2049.907,106.357 2049.907,106.104
no net on Internal Plane 2 (split plane): 1923.923,208.974 1923.923,209.227 2049.907,209.227 2049.907,208.974
no net on Internal Plane 2 (split plane): 1923.923,207.704 1923.923,207.957 2049.907,207.957 2049.907,207.704
no net on Internal Plane 2 (split plane): 1923.923,108.644 1923.923,206.687 2049.907,206.687 2049.907,108.644
no net on Internal Plane 2 (split plane): 1923.923,107.374 1923.923,107.627 2049.907,107.627 2049.907,107.374
no net on Internal Plane 2 (split plane): 1923.923,106.104 1923.923,106.357 2049.907,106.357 2049.907,106.104

## Keep-outs
Keep-Out Layer:
  lines w0.254: 123.825,119.38 123.825,179.07
  lines w0.305: 67.31,123.19 101.6,123.19 101.6,142.24 91.44,142.24 91.44,163.83 67.31,163.83 ; 99.06,85.09 99.06,119.38 123.825,119.38 ; 67.31,85.09 176.53,85.09 176.53,179.07 67.31,179.07 67.31,85.09

## Other copper
Top Layer:
  text "Ad Hoc Radio Node" at 68.58,93.98 h1.52
  text "Revision 2005 - 2" at 68.58,91.44 h1.52
  text "Li-Wen Yip" at 68.58,88.9 h1.52
  text "Sprvsr: John Wicking" at 68.58,86.36 h1.52

## Dimensions
67.31,85.09 to 176.53,85.09 on Mechanical 1
67.31,85.09 to 67.31,179.07 on Mechanical 1

## Text inside footprints (layer, text, board x,y; h text height)
JP8: Top Overlay "6" at 156.635,167.745 h1.5; Top Overlay "9" at 164.945,167.745 h1.5; Top Overlay "5" at 166.33,158.345 h1.5; Top Overlay "1" at 155.5,158.345 h1.5
U1: Top Overlay "1" at 121.92,120.396 h1.52
U8: Top Overlay "3" at 113.015,168.14 h1.5 r270; Top Overlay "1" at 113.015,172.97 h1.5 r270; Top Overlay "2" at 113.015,170.68 h1.5 r270
U9: Top Overlay "3" at 135.905,160.52 h1.5 r90; Top Overlay "1" at 135.905,165.35 h1.5 r90; Top Overlay "2" at 135.905,163.06 h1.5 r90